# Allegro board pc042a_toplevel_04.brd
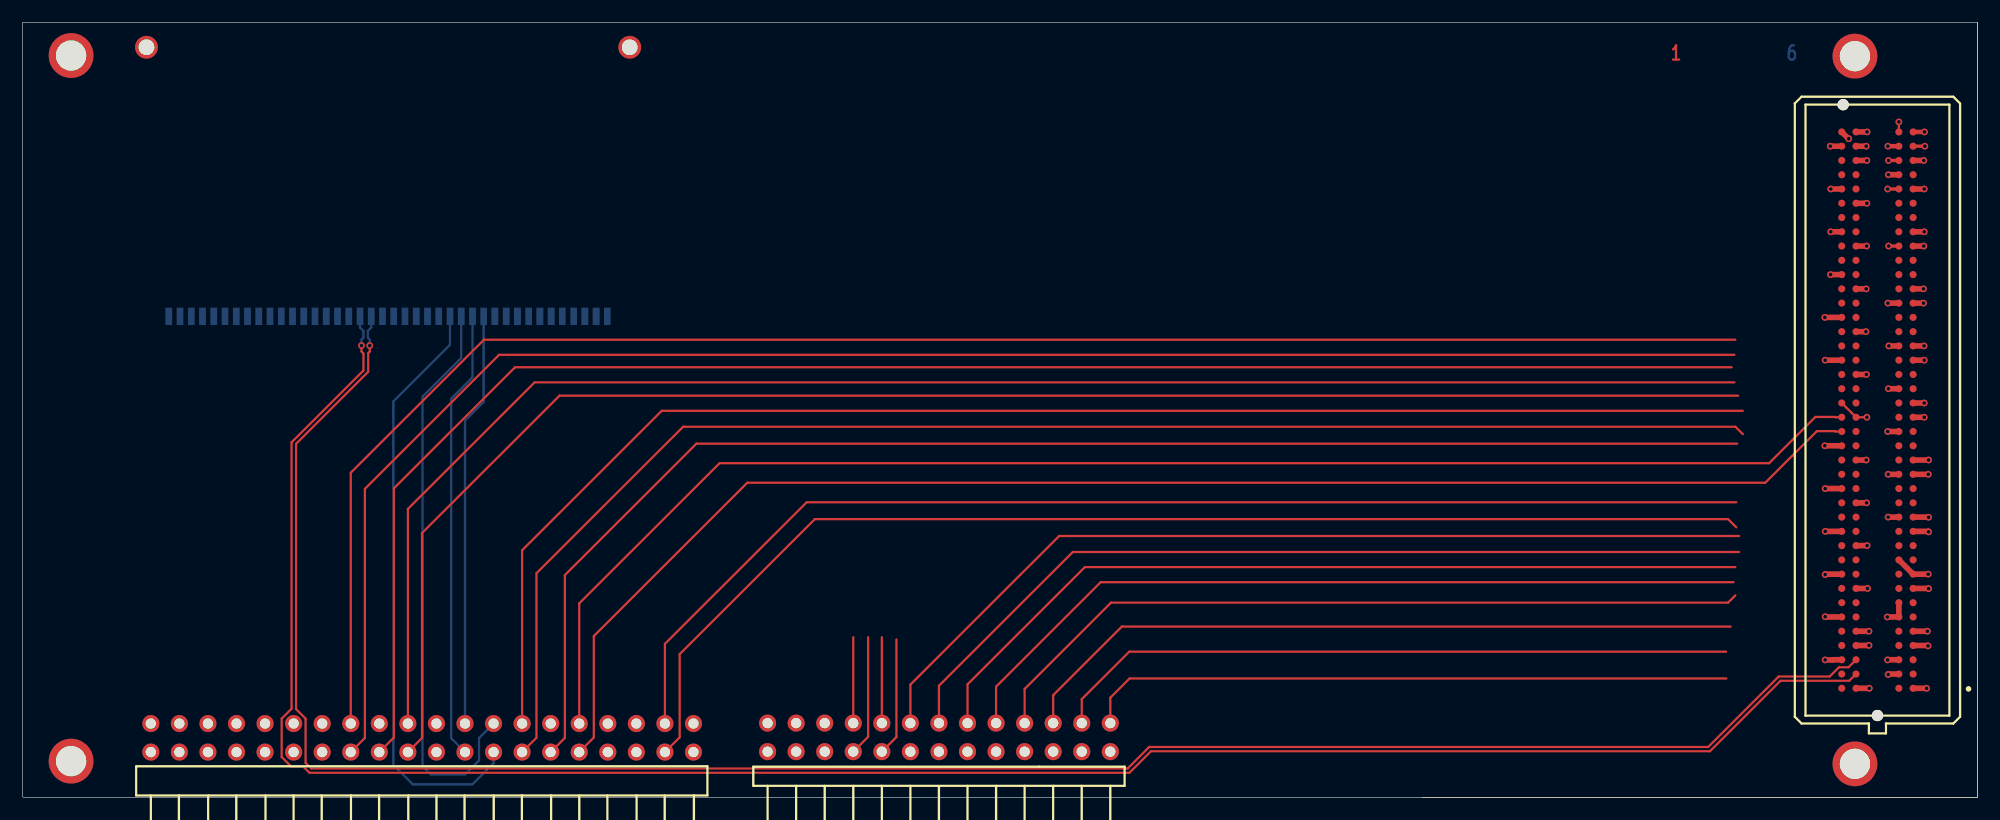
[diagram p0: board, top side]
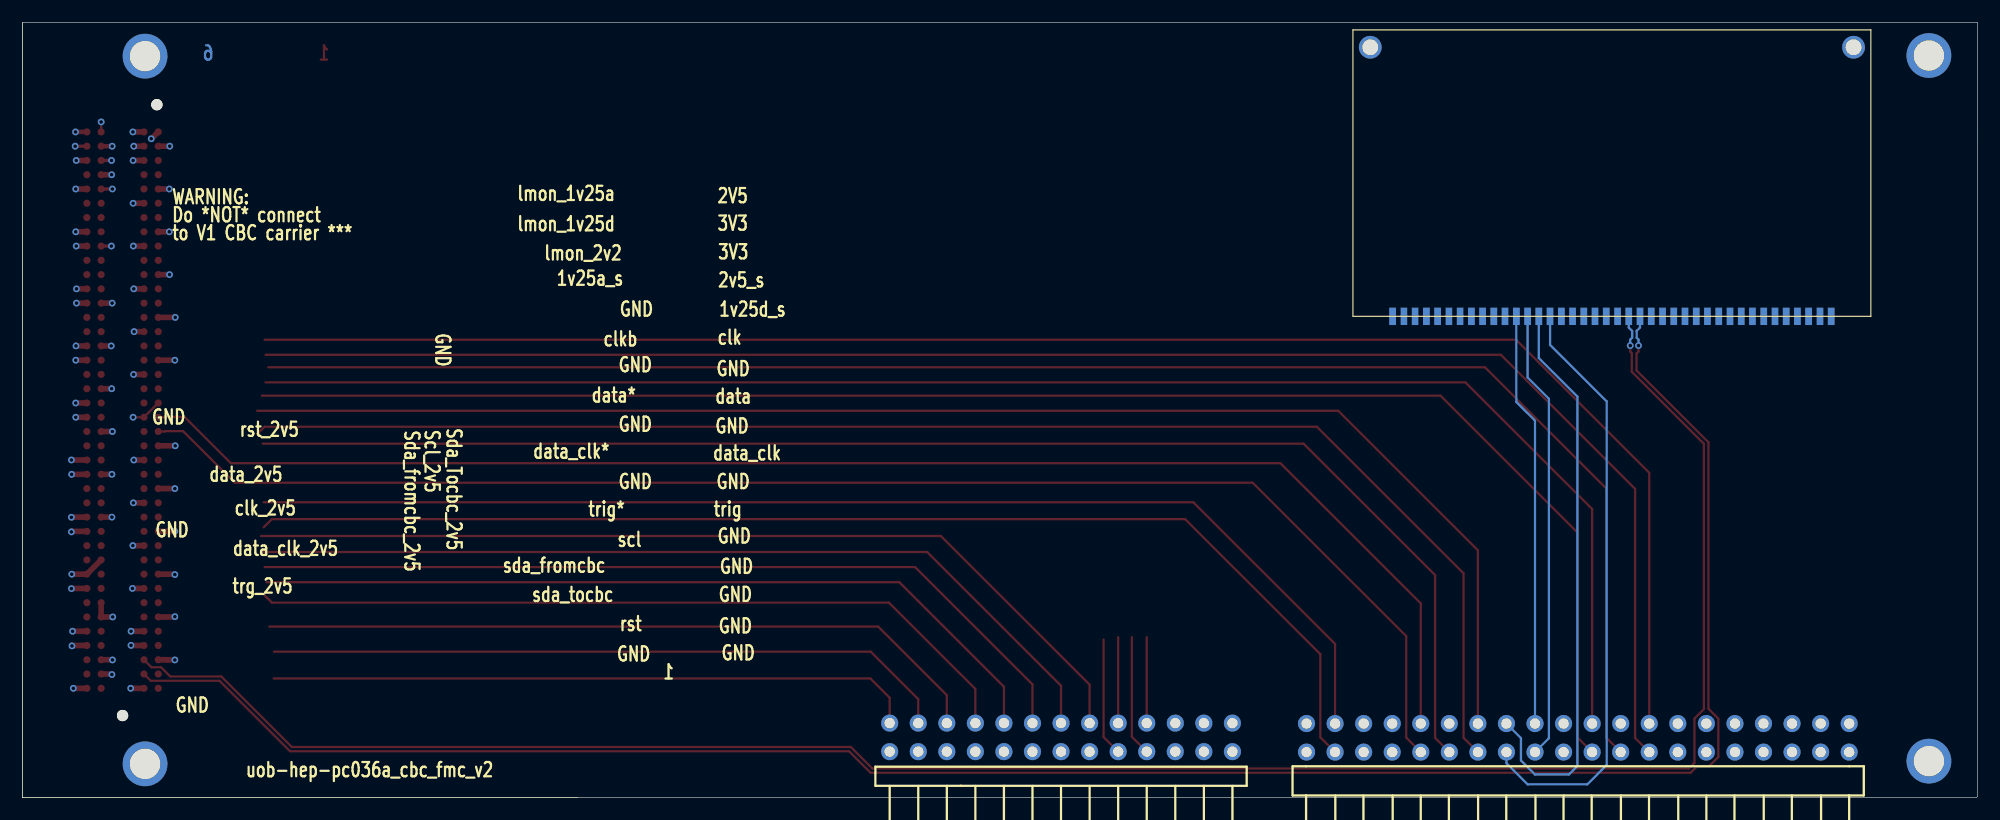
[diagram p1: board, bottom side, seen from below]

Outline 173.87 x 69 mm; copper layers: TOP, GND, L3, SIG1, L5, BOTTOM. Coordinates in mm from the lower left corner of the outline.
Outline path: 124.47,0 173.87,0 173.87,69 ; 0,69 0,59.18 0,58.67 0,0.09 0.09,0.01 173.86,0.01 173.86,0.01 173.86,69 0,69

## Design rules (mm)
net group FMC_LA: nets FMC_LA<6> FMC_LA<7> FMC_LA<8> FMC_LA<9> FMC_LA<10> FMC_LA<11> FMC_LA<12> FMC_LA<13> FMC_LA<14> FMC_LA<16> FMC_LA<17> FMC_LA<18> FMC_LA<19> FMC_LA<20> FMC_LA<21> FMC_LA<22> FMC_LA<23> FMC_LA<24> FMC_LA<25> FMC_LA<26> FMC_LA<27> FMC_LA<28> FMC_LA<29> FMC_LA<30> FMC_LA<31> FMC_LA<32> FMC_LA<33>
net group FMC_LA*: nets FMC_LA*<6> FMC_LA*<7> FMC_LA*<8> FMC_LA*<9> FMC_LA*<10> FMC_LA*<11> FMC_LA*<12> FMC_LA*<13> FMC_LA*<14> FMC_LA*<16> FMC_LA*<17> FMC_LA*<18> FMC_LA*<19> FMC_LA*<20> FMC_LA*<21> FMC_LA*<22> FMC_LA*<23> FMC_LA*<24> FMC_LA*<25> FMC_LA*<26> FMC_LA*<27> FMC_LA*<28> FMC_LA*<29> FMC_LA*<30> FMC_LA*<31> FMC_LA*<32> FMC_LA*<33>

## Placement (name value [footprint] x y rotation side)
J1  -  [CONHE13C2X20M]  11.41 6.59 90 bottom
J2  -  [CONHE13C2X13M]  66.26 6.63 270 bottom
J3  -  [SAMTEC_ASP-134606-01]  164.97 34.49 270 top
LK1  -  [FXG_M2-7]  162.97 66 0 top
LK2  -  [FXG_M2-7]  162.97 3 0 top
LK3  -  [FXG_M2-7]  4.32 3.24 0 top
LK4  -  [FXG_M2-7]  4.32 66.06 0 top
NOREF  -  []  173.87 0 90 top
NOREF#2  -  []  97.37 3.25 0 top
NOREF#3  -  []  27.67 -77.6 0 top
U1  -  [SK_SAMTEC_MB1_140_01]  13.01 42.84 270 bottom

## Library data of the parts
J1 = CON40P: part number: CON40P-BARC2X20
J2 = CON26P: part number: CON26P-BARC2X13
J3 = CON160P_40CDGH: part number: ASP-134606-01
LK1-LK4 = 1-HOLE: part number: 1-HOLE_FXG2-7-BASE
U1 = SK-SAMTEC-40PIN-MB1: part number: SK-SAMTEC-40PIN-MB1_RT-SMT-SAMTEC

## Footprints (pads in the part's own frame, mm; a bottom-side part is the same pattern mirrored in y, then rotated)
CONHE13C2X13M
  round 1.524 hole 0.914: 1(0,0) 2(2.54,0) 3(0,-2.54) 4(2.54,-2.54) 5(0,-5.08) 6(2.54,-5.08) 7(0,-7.62) 8(2.54,-7.62) 9(0,-10.16) 10(2.54,-10.16) 11(0,-12.7) 12(2.54,-12.7) 13(0,-15.24) 14(2.54,-15.24) 15(0,-17.78) 16(2.54,-17.78) 17(0,-20.32) 18(2.54,-20.32) 19(0,-22.86) 20(2.54,-22.86) 21(0,-25.4) 22(2.54,-25.4) 23(0,-27.94) 24(2.54,-27.94) 25(0,-30.48) 26(2.54,-30.48)
CONHE13C2X20M
  round 1.524 hole 0.914: 1(0,0) 2(-2.54,0) 3(0,2.54) 4(-2.54,2.54) 5(0,5.08) 6(-2.54,5.08) 7(0,7.62) 8(-2.54,7.62) 9(0,10.16) 10(-2.54,10.16) 11(0,12.7) 12(-2.54,12.7) 13(0,15.24) 14(-2.54,15.24) 15(0,17.78) 16(-2.54,17.78) 17(0,20.32) 18(-2.54,20.32) 19(0,22.86) 20(-2.54,22.86) 21(0,25.4) 22(-2.54,25.4) 23(0,27.94) 24(-2.54,27.94) 25(0,30.48) 26(-2.54,30.48) 27(0,33.02) 28(-2.54,33.02) 29(0,35.56) 30(-2.54,35.56) 31(0,38.1) 32(-2.54,38.1) 33(0,40.64) 34(-2.54,40.64) 35(0,43.18) 36(-2.54,43.18) 37(0,45.72) 38(-2.54,45.72) 39(0,48.26) 40(-2.54,48.26)
FXG_M2-7
  round 3.988 hole 2.692: 1(0,0)
SAMTEC_ASP-134606-01
  round 1 hole 1.3 unplated: (-27.19,-3.05) (27.19,0)
  round 0.64 smd: C1(24.765,3.175) C2(23.495,3.175) C3(22.225,3.175) C4(20.955,3.175) C5(19.685,3.175) C6(18.415,3.175) C7(17.145,3.175) C8(15.875,3.175) C9(14.605,3.175) C10(13.335,3.175) C11(12.065,3.175) C12(10.795,3.175) C13(9.525,3.175) C14(8.255,3.175) C15(6.985,3.175) C16(5.715,3.175) C17(4.445,3.175) C18(3.175,3.175) C19(1.905,3.175) C20(0.635,3.175) C21(-0.635,3.175) C22(-1.905,3.175) C23(-3.175,3.175) C24(-4.445,3.175) C25(-5.715,3.175) C26(-6.985,3.175) C27(-8.255,3.175) C28(-9.525,3.175) C29(-10.795,3.175) C30(-12.065,3.175) C31(-13.335,3.175) C32(-14.605,3.175) C33(-15.875,3.175) C34(-17.145,3.175) C35(-18.415,3.175) C36(-19.685,3.175) C37(-20.955,3.175) C38(-22.225,3.175) C39(-23.495,3.175) C40(-24.765,3.175) D1(24.765,1.905) D2(23.495,1.905) D3(22.225,1.905) D4(20.955,1.905) D5(19.685,1.905) D6(18.415,1.905) D7(17.145,1.905) D8(15.875,1.905) D9(14.605,1.905) D10(13.335,1.905) D11(12.065,1.905) D12(10.795,1.905) D13(9.525,1.905) D14(8.255,1.905) D15(6.985,1.905) D16(5.715,1.905) D17(4.445,1.905) D18(3.175,1.905) D19(1.905,1.905) D20(0.635,1.905) D21(-0.635,1.905) D22(-1.905,1.905) D23(-3.175,1.905) D24(-4.445,1.905) D25(-5.715,1.905) D26(-6.985,1.905) D27(-8.255,1.905) D28(-9.525,1.905) D29(-10.795,1.905) D30(-12.065,1.905) D31(-13.335,1.905) D32(-14.605,1.905) D33(-15.875,1.905) D34(-17.145,1.905) D35(-18.415,1.905) D36(-19.685,1.905) D37(-20.955,1.905) D38(-22.225,1.905) D39(-23.495,1.905) D40(-24.765,1.905) G1(24.765,-1.905) G2(23.495,-1.905) G3(22.225,-1.905) G4(20.955,-1.905) G5(19.685,-1.905) G6(18.415,-1.905) G7(17.145,-1.905) G8(15.875,-1.905) G9(14.605,-1.905) G10(13.335,-1.905) G11(12.065,-1.905) G12(10.795,-1.905) G13(9.525,-1.905) G14(8.255,-1.905) G15(6.985,-1.905) G16(5.715,-1.905) G17(4.445,-1.905) G18(3.175,-1.905) G19(1.905,-1.905) G20(0.635,-1.905) G21(-0.635,-1.905) G22(-1.905,-1.905) G23(-3.175,-1.905) G24(-4.445,-1.905) G25(-5.715,-1.905) G26(-6.985,-1.905) G27(-8.255,-1.905) G28(-9.525,-1.905) G29(-10.795,-1.905) G30(-12.065,-1.905) G31(-13.335,-1.905) G32(-14.605,-1.905) G33(-15.875,-1.905) G34(-17.145,-1.905) G35(-18.415,-1.905) G36(-19.685,-1.905) G37(-20.955,-1.905) G38(-22.225,-1.905) G39(-23.495,-1.905) G40(-24.765,-1.905) H1(24.765,-3.175) H2(23.495,-3.175) H3(22.225,-3.175) H4(20.955,-3.175) H5(19.685,-3.175) H6(18.415,-3.175) H7(17.145,-3.175) H8(15.875,-3.175) H9(14.605,-3.175) H10(13.335,-3.175) H11(12.065,-3.175) H12(10.795,-3.175) H13(9.525,-3.175) H14(8.255,-3.175) H15(6.985,-3.175) H16(5.715,-3.175) H17(4.445,-3.175) H18(3.175,-3.175) H19(1.905,-3.175) H20(0.635,-3.175) H21(-0.635,-3.175) H22(-1.905,-3.175) H23(-3.175,-3.175) H24(-4.445,-3.175) H25(-5.715,-3.175) H26(-6.985,-3.175) H27(-8.255,-3.175) H28(-9.525,-3.175) H29(-10.795,-3.175) H30(-12.065,-3.175) H31(-13.335,-3.175) H32(-14.605,-3.175) H33(-15.875,-3.175) H34(-17.145,-3.175) H35(-18.415,-3.175) H36(-19.685,-3.175) H37(-20.955,-3.175) H38(-22.225,-3.175) H39(-23.495,-3.175) H40(-24.765,-3.175)
SK_SAMTEC_MB1_140_01
  round 2.032 hole 1.4: (-23.952,-40.99) (-23.952,1.99)
  rect 1.55x0.6 smd: 1(0,0) 2(0,-1) 3(0,-2) 4(0,-3) 5(0,-4) 6(0,-5) 7(0,-6) 8(0,-7) 9(0,-8) 10(0,-9) 11(0,-10) 12(0,-11) 13(0,-12) 14(0,-13) 15(0,-14) 16(0,-15) 17(0,-16) 18(0,-17) 19(0,-18) 20(0,-19) 21(0,-20) 22(0,-21) 23(0,-22) 24(0,-23) 25(0,-24) 26(0,-25) 27(0,-26) 28(0,-27) 29(0,-28) 30(0,-29) 31(0,-30) 32(0,-31) 33(0,-32) 34(0,-33) 35(0,-34) 36(0,-35) 37(0,-36) 38(0,-37) 39(0,-38) 40(0,-39)

## Nets
GND_CHASSIS: LK3.1(A<0>) LK4.1(A<0>)
GND_SIGNAL: J1.2(A<1>) J1.5(A<4>) J1.6(A<5>) J1.9(A<8>) J1.10(A<9>) J1.13(A<12>) J1.14(A<13>) J2.6(A<5>) J2.12(A<11>) J2.14(A<13>) J2.16(A<15>) J2.18(A<17>) J2.20(A<19>) J2.22(A<21>) J2.24(A<23>) J2.26(A<25>) J3.C1(C<1>) J3.C4(C<4>) J3.C5(C<5>) J3.C8(C<8>) J3.C9(C<9>) J3.C12(C<12>) J3.C13(C<13>) J3.C16(C<16>) J3.C17(C<17>) J3.C20(C<20>) J3.C21(C<21>) J3.C24(C<24>) J3.C25(C<25>) J3.C28(C<28>) J3.C29(C<29>) J3.C32(C<32>) J3.C33(C<33>) J3.C36(C<36>) J3.C38(C<38>) J3.C40(C<40>) J3.D2(D<2>) J3.D3(D<3>) J3.D6(D<6>) J3.D7(D<7>) J3.D10(D<10>) J3.D13(D<13>) J3.D16(D<16>) J3.D19(D<19>) J3.D22(D<22>) J3.D25(D<25>) J3.D28(D<28>) J3.D37(D<37>) J3.D39(D<39>) J3.G1(G<1>) J3.G4(G<4>) J3.G5(G<5>) J3.G8(G<8>) J3.G11(G<11>) J3.G14(G<14>) J3.G17(G<17>) J3.G20(G<20>) J3.G23(G<23>) J3.G26(G<26>) J3.G29(G<29>) J3.G32(G<32>) J3.G35(G<35>) J3.G38(G<38>) J3.G40(G<40>) J3.H3(H<3>) J3.H6(H<6>) J3.H9(H<9>) J3.H12(H<12>) J3.H15(H<15>) J3.H18(H<18>) J3.H21(H<21>) J3.H24(H<24>) J3.H27(H<27>) J3.H30(H<30>) J3.H33(H<33>) J3.H36(H<36>) J3.H39(H<39>) U1.1(A<0>) U1.5(A<4>) U1.6(A<5>) U1.12(A<11>) U1.23(A<22>) U1.24(A<23>) U1.37(A<36>) U1.38(A<37>) U1.39(A<38>) U1.40(A<39>)
P1V5A: J1.35(A<34>) J1.36(A<35>) U1.20(A<19>) U1.21(A<20>)
P2V5: J3.G39(G<39>) J3.H40(H<40>)
P3V3: J3.C39(C<39>) J3.D32(D<32>) J3.D36(D<36>) J3.D38(D<38>) J3.D40(D<40>)
P5V: J1.17(A<16>)
P12V: J3.C35(C<35>) J3.C37(C<37>)
A0: J1.23(A<22>) U1.29(A<28>)
A1: J1.24(A<23>) U1.28(A<27>)
A1+: J1.12(A<11>)
A1-: J1.11(A<10>)
A2: J1.25(A<24>) U1.27(A<26>)
A2+: J1.4(A<3>)
A2-: J1.3(A<2>)
A3: J1.26(A<25>) U1.26(A<25>)
BIAS: J1.40(A<39>)
BIAS_GND: J1.39(A<38>)
CA1+: U1.10(A<9>)
CA1-: U1.11(A<10>)
CCLK_ROC+: J3.G2(G<2>) U1.18(A<17>)
CCLK_ROC-: J3.G3(G<3>) U1.19(A<18>)
CCLK_SEL: U1.4(A<3>)
CCTR+: U1.16(A<15>)
CCTR-: U1.17(A<16>)
CI2C_CLK+: U1.2(A<1>)
CI2C_CLK-: U1.3(A<2>)
CI2C_DAT+: U1.30(A<29>)
CI2C_DAT-: U1.31(A<30>)
CRESET*: U1.9(A<8>)
CTIN+: U1.7(A<6>)
CTIN-: U1.8(A<7>)
CTOUT+: U1.32(A<31>)
CTOUT-: U1.33(A<32>)
CTRIGOUT+: U1.13(A<12>)
CTRIGOUT-: U1.14(A<13>)
DP0_C2M: J3.C2(C<2>)
DP0_C2M*: J3.C3(C<3>)
DP0_M2C: J3.C6(C<6>)
DP0_M2C*: J3.C7(C<7>)
FCLK_SEL_IN: J3.H10(H<10>)
FMC_LA*<6>: J3.C11(C<11>)
FMC_LA*<7>: J3.H14(H<14>)
FMC_LA*<8>: J3.G13(G<13>)
FMC_LA*<9>: J3.D15(D<15>)
FMC_LA*<10>: J3.C15(C<15>)
FMC_LA*<11>: J3.H17(H<17>)
FMC_LA*<12>: J3.G16(G<16>)
FMC_LA*<13>: J3.D18(D<18>)
FMC_LA*<14>: J3.C19(C<19>)
FMC_LA*<16>: J3.G19(G<19>)
FMC_LA*<17>: J3.D21(D<21>)
FMC_LA*<18>: J3.C23(C<23>)
FMC_LA*<19>: J3.H23(H<23>)
FMC_LA*<20>: J3.G22(G<22>)
FMC_LA*<21>: J3.H26(H<26>)
FMC_LA*<22>: J3.G25(G<25>)
FMC_LA*<23>: J3.D24(D<24>)
FMC_LA*<24>: J3.H29(H<29>)
FMC_LA*<25>: J3.G28(G<28>)
FMC_LA*<26>: J3.D27(D<27>)
FMC_LA*<27>: J3.C27(C<27>)
FMC_LA*<28>: J3.H32(H<32>)
FMC_LA*<29>: J3.G31(G<31>)
FMC_LA*<30>: J3.H35(H<35>)
FMC_LA*<31>: J3.G34(G<34>)
FMC_LA*<32>: J3.H38(H<38>)
FMC_LA*<33>: J3.G37(G<37>)
FMC_LA<6>: J3.C10(C<10>)
FMC_LA<7>: J2.11(A<10>) J3.H13(H<13>)
FMC_LA<8>: J2.13(A<12>) J3.G12(G<12>)
FMC_LA<9>: J2.15(A<14>) J3.D14(D<14>)
FMC_LA<10>: J2.17(A<16>) J3.C14(C<14>)
FMC_LA<11>: J2.19(A<18>) J3.H16(H<16>)
FMC_LA<12>: J2.21(A<20>) J3.G15(G<15>)
FMC_LA<13>: J2.23(A<22>) J3.D17(D<17>)
FMC_LA<14>: J2.25(A<24>) J3.C18(C<18>)
FMC_LA<16>: J3.G18(G<18>)
FMC_LA<17>: J3.D20(D<20>)
FMC_LA<18>: J3.C22(C<22>)
FMC_LA<19>: J3.H22(H<22>)
FMC_LA<20>: J3.G21(G<21>)
FMC_LA<21>: J3.H25(H<25>)
FMC_LA<22>: J3.G24(G<24>)
FMC_LA<23>: J3.D23(D<23>)
FMC_LA<24>: J3.H28(H<28>)
FMC_LA<25>: J3.G27(G<27>)
FMC_LA<26>: J3.D26(D<26>)
FMC_LA<27>: J3.C26(C<26>)
FMC_LA<28>: J3.H31(H<31>)
FMC_LA<29>: J3.G30(G<30>)
FMC_LA<30>: J3.H34(H<34>)
FMC_LA<31>: J3.G33(G<33>)
FMC_LA<32>: J3.H37(H<37>)
FMC_LA<33>: J3.G36(G<36>)
FMC_PRSNT_M2C_L: J3.H2(H<2>)
FMC_PWR_GOOD_FLASH_RST_B: J3.D1(D<1>)
FMC_TCK_BUF: J3.D29(D<29>)
FMC_TDO: J3.D31(D<31>)
FMC_TMS_BUF: J3.D33(D<33>)
FPGA_TDO: J3.D30(D<30>)
FPON: J3.D11(D<11>)
FRESET_IN*: J3.H11(H<11>)
FRESET_OUT*: J3.D12(D<12>)
GA0: J3.C34(C<34>)
GA1: J3.D35(D<35>)
GBTCLK0_M2C: J3.D4(D<4>)
GBTCLK0_M2C*: J3.D5(D<5>)
IIC_SCL_MAIN: J3.C30(C<30>)
IIC_SDA_MAIN: J3.C31(C<31>)
RCLK_ROC+: J1.28(A<27>) J3.H4(H<4>)
RCLK_ROC-: J1.27(A<26>) J3.H5(H<5>)
RCLK_SEL: J1.18(A<17>)
RCTR+: J1.32(A<31>) J3.H19(H<19>)
RCTR-: J1.31(A<30>) J3.H20(H<20>)
RI2C_CLK+: J1.22(A<21>)
RI2C_CLK-: J1.21(A<20>)
RI2C_DAT+: J1.38(A<37>) J3.G6(G<6>)
RI2C_DAT-: J1.37(A<36>) J3.G7(G<7>)
RPON: J2.8(A<7>)
RRESET*: J1.30(A<29>)
RTIN+: J1.20(A<19>) J3.D8(D<8>)
RTIN-: J1.19(A<18>) J3.D9(D<9>)
RTOUT+: J1.16(A<15>) J3.H7(H<7>)
RTOUT-: J1.15(A<14>) J3.H8(H<8>)
RTRIGOUT+: J1.8(A<7>) J3.G9(G<9>)
RTRIGOUT-: J1.7(A<6>) J3.G10(G<10>)
SUPPLY_1: J1.33(A<32>) J1.34(A<33>) U1.22(A<21>) U1.35(A<34>) U1.36(A<35>)
TRST_L: J3.D34(D<34>)
UNNAMED_2_CAPCERSMDCL2_I501_B: U1.15(A<14>)
UNNAMED_2_CAPCERSMDCL2_I503_B: U1.25(A<24>)
UNNAMED_2_CAPCERSMDCL2_I505_B: U1.34(A<33>)
UNNAMED_8_CON26P_I485_A: J2.7(A<6>)
UNNAMED_8_CON26P_I485_A_1: J2.10(A<9>)
UNNAMED_8_CON26P_I485_A_2: J2.9(A<8>)
VREF_A_M2C: J3.H1(H<1>)

Pads without a net: J1 1 29; J2 1 2 3 4 5; LK1 1; LK2 1

## Via types
v1: diameter 0.61, hole 0.33, TOP to BOTTOM, 67 vias

## Routing (per net, layer and track width the routed paths; a pad name or vN(x,y) marks a point on that pad's centre or on a via; arc(x,y) is an arc through that point)
GND_SIGNAL: length 69
  TOP w0.2: v1(164.03,33.86) 163.06,33.86 162.67,34.24 162.67,34.24 162.18,34.74 162.18,34.74 161.79,35.12
  TOP w0.4: 168.14,59.26 v1(169.15,59.26) ; J3.D39 v1(165.89,57.98)
  TOP w0.5: 161.79,19.89 160.35,19.89 v1(160.32,19.85) ; 166.87,17.34 166.87,16.07 v1(165.84,16.07) ; J3.H33 v1(160.81,50.37) ; J3.C1 v1(169.34,9.72) ; 168.14,33.86 v1(169.13,33.86) ; J3.H36 v1(160.81,54.17) ; 168.14,40.2 v1(169.11,40.2) ; J3.D25 v1(165.98,40.2) ; v1(169.52,30.05) 169.51,30.05 J3.C17 ; 166.87,12.27 165.88,12.27 v1(165.87,12.25) ; v1(160.32,16.1) 160.34,16.07 161.79,16.07 ; 163.06,37.66 v1(163.99,37.66) ; 163.06,56.72 v1(164.03,56.72) ; 168.14,49.09 v1(169.09,49.09) ; 168.14,18.62 169.5,18.62 v1(169.52,18.6) ; J3.C24 v1(169.13,38.94) ; J3.C21 v1(169.13,35.12) ; 161.79,23.7 v1(160.32,23.7) ; J3.C4 169.43,13.54 v1(169.47,13.5) ; J3.C5 v1(169.41,14.8) ; 168.14,45.28 v1(169.07,45.28) ; 161.79,12.27 161.01,12.27 161,12.25 v1(160.32,12.25) ; J3.D37 v1(165.94,55.45) ; J3.H30 v1(160.79,46.55) ; 161.79,31.32 v1(160.28,31.32) ; 166.87,28.77 v1(165.91,28.77) ; v1(169.48,19.89) J3.C9 166.87,21.16 ; 168.14,50.37 v1(169.13,50.37) ; J3.C13 169.5,24.96 v1(169.52,24.95) ; 163.06,41.48 v1(163.94,41.48) ; J3.D28 v1(165.89,44.02) ; 161.79,27.5 160.32,27.5 v1(160.32,27.5) ; 166.87,24.96 v1(165.91,24.96) ; 168.14,44.02 v1(169.07,44.02) ; J3.H24 v1(160.32,38.94) ; 163.06,52.91 v1(164.03,52.91) ; 163.06,59.26 v1(164.05,59.26) ; J3.C16 v1(169.49,28.77) ; J3.G11 v1(164.05,22.43) ; J3.C12 169.47,23.7 v1(169.52,23.65) ; v1(165.92,10.95) 165.96,11 166.87,11 ; v1(164.22,13.55) 164.2,13.54 J3.G4 ; J3.H27 v1(160.28,42.74) ; 163.06,45.28 v1(163.96,45.28) ; 166.87,36.4 v1(165.94,36.4) ; 168.14,56.72 v1(169.09,56.72) ; J3.G14 v1(164.01,26.23) ; 168.14,54.17 v1(169.13,54.17) ; 166.87,32.59 v1(165.87,32.59) ; J3.H39 v1(160.77,57.98) ; 163.06,49.09 v1(164.01,49.09) ; J3.G17 v1(163.96,30.05) ; 163.06,18.62 v1(164.09,18.62) ; J3.G5 v1(164.21,14.8) ; J3.G1 v1(164.24,9.72)
P2V5: length 1.8
  TOP w0.5: v1(162.42,58.65) 162.4,58.65 161.79,59.26 ; 163.06,57.98 v1(163.97,57.98)
P3V3: length 4.8
  TOP w0.2: 166.87,59.26 v1(166.87,60.15)
  TOP w0.3: J3.D36 v1(165.87,54.17) ; J3.D32 v1(165.96,49.09) ; J3.D38 v1(165.95,56.72) ; 168.14,57.98 v1(169.18,57.98)
A0: length 36.9
  BOTTOM w0.2: U1.29 41.01,35.22 39.35,33.56 J1.23
A1: length 40.1
  BOTTOM w0.2: U1.28 40.01,37.4 38.12,35.5 38.12,5.28 J1.24
A2: length 51.1
  BOTTOM w0.2: J1.25 40.6,5.3 40.6,3.3 39.36,2.05 36.33,2.05 35.58,2.8 35.58,35.7 39.01,39.13 U1.27
A3: length 53.4
  BOTTOM w0.2: U1.26 38.01,40.3 32.98,35.27 32.98,2.9 34.7,1.17 40.01,1.17 41.89,3.06 J1.26
CCLK_ROC+: length 186.7
  TOP w0.2: v1(30.15,40.24) 30.15,39.7 30.32,39.53 30.32,38.02 23.95,31.65 23.95,31.63 23.93,31.6 23.93,7.9 23.05,7.03 23.05,3.61 23.93,2.73 25,2.73 25.52,2.21 98.44,2.21 100.36,4.12 150.07,4.12 156.34,10.39 162.46,10.39 163.06,11
  BOTTOM w0.2: v1(30.15,40.24) 30.15,40.77 30.31,40.93 30.31,41.54 30.01,41.84 U1.18
CCLK_ROC-: length 185.1
  TOP w0.2: v1(30.88,40.24) 30.88,39.7 30.75,39.57 30.75,37.9 24.33,31.49 24.33,7.87 25.17,7.03 25.17,3.09 25.68,2.58 98.28,2.58 100.2,4.5 149.91,4.5 156.19,10.78 160.72,10.78 161.54,11.6 162.39,11.6 J3.G3
  BOTTOM w0.2: v1(30.88,40.24) 30.88,40.77 30.71,40.94 30.71,41.54 31.01,41.84 U1.19
FMC_LA<7>: length 82.6
  TOP w0.2: J2.11 78.96,10.05 92.19,23.28 152.66,23.28
FMC_LA<8>: length 79.4
  TOP w0.2: J2.13 81.5,9.95 93.41,21.86 152.66,21.86
FMC_LA<9>: length 76.1
  TOP w0.2: 152.33,20.51 94.48,20.51 84.04,10.08 J2.15
FMC_LA<10>: length 72.7
  TOP w0.2: 152.16,19.17 95.88,19.17 86.58,9.87 J2.17
FMC_LA<11>: length 69.7
  TOP w0.2: J2.19 89.12,9.67 96.81,17.35 151.68,17.35 152.33,18
FMC_LA<12>: length 65.3
  TOP w0.2: 151.91,15.22 97.77,15.22 91.66,9.11 J2.21
FMC_LA<13>: length 61.2
  TOP w0.2: J2.23 94.2,8.76 98.43,12.98 151.51,12.98
FMC_LA<14>: length 57.8
  TOP w0.2: 151.53,10.6 98.46,10.6 96.74,8.88 J2.25
RCLK_ROC+: length 129.4
  TOP w0.2: 152.99,32.35 152.34,33.01 58.75,33.01 45.71,19.97 45.71,5.32 J1.28
RCLK_ROC-: length 129.1
  TOP w0.2: J1.27 44.43,22.01 56.85,34.43 152.99,34.43
RCLK_SEL: length 147.5
  TOP w0.2: J1.18 33.02,5.33 33.02,27.52 43.81,38.3 152,38.3
RCTR+: length 129.4
  TOP w0.2: J1.32 50.81,5.34 50.81,14.37 64.46,28.03 154.99,28.03 159.58,32.62 161.21,32.62 161.24,32.59 161.79,32.59
RCTR-: length 129.9
  TOP w0.2: J1.31 49.51,17.29 61.99,29.77 155.33,29.77 159.45,33.88 161.22,33.88 161.24,33.86 161.79,33.86
RI2C_DAT+: length 108.5
  TOP w0.2: 152.41,24.05 151.68,24.78 70.47,24.78 58.45,12.76 58.45,5.36 J1.38
RI2C_DAT-: length 107.6
  TOP w0.2: J1.37 57.13,13.68 69.74,26.29 152.41,26.29
RPON: length 10.7
  TOP w0.2: 75.21,14.27 75.21,5.41 J2.8
RRESET*: length 125.4
  TOP w0.2: 152.5,31.5 59.94,31.5 48.24,19.81 48.24,5.31 J1.30
RTIN+: length 142.1
  TOP w0.2: 34.27,4.05 35.53,5.31 35.53,23.55 47.76,35.77 152.58,35.77
RTIN-: length 141.7
  TOP w0.2: 34.27,6.59 34.27,25.69 45.55,36.96 152.25,36.96
RTOUT+: length 150.7
  TOP w0.2: 152.25,39.41 42.38,39.41 30.45,27.48 30.45,5.3 J1.16
RTOUT-: length 150.4
  TOP w0.2: 152.33,40.76 41.04,40.76 29.19,28.91 J1.15
UNNAMED_8_CON26P_I485_A: length 7.6
  TOP w0.2: J2.7 73.88,14.27
UNNAMED_8_CON26P_I485_A_1: length 10.5
  TOP w0.2: J2.10 77.72,5.38 77.72,14.07
UNNAMED_8_CON26P_I485_A_2: length 7.6
  TOP w0.2: J2.9 76.42,14.27

## Text on the board
BOTTOM: 6
Ref Des/Silkscreen Bottom: 1 | GND | 1v25d_s | 3V3 | 2v5_s | 2V5 | clk | data | trig | data_clk | rst | scl | clkb | data* | trig* | 1v25a_s | lmon_2v2 | data_clk* | sda_tocbc | lmon_1v25a | lmon_1v25d | sda_fromcbc | uob-hep-pc036a_cbc_fmc_v2 | rst_2v5 | clk_2v5 | data_clk_2v5 | trg_2v5 | data_2v5 | WARNING: | Do *NOT* connect | to V1 CBC carrier *** | Sda_Tocbc_2v5 | Scl_2v5 | Sda_fromcbc_2v5
User.Comments: pc036a_cbc_fmc_v2 | FMC to interface CBC to FPGA board.
TOP: 1
GND: 2
L3: 3
SIG1: 4
L5: 5
PAGE_OUTLINE: FIGURE | SIZE | 0.3302 | 0.6 | 0.9144 | 1.016 | 1.2 | 2.6924 | 1.3 | DRILL CHART: TOP to BOTTOM | ALL UNITS ARE IN MILLIMETERS | PLATED | NON-PLATED | QTY | 227 | 12 | 1 | 33 | 5 | 4 | 2
